# Altium PCB PCB2.PcbDoc
Units mm, origin at the board's own origin, x right, y up, seen from the top; angles counter-clockwise.
Board outline 91.06 x 48.64 mm, 2 copper layers (Top Layer, Bottom Layer); 45 components, 40 nets, 163 pads, 2 vias.
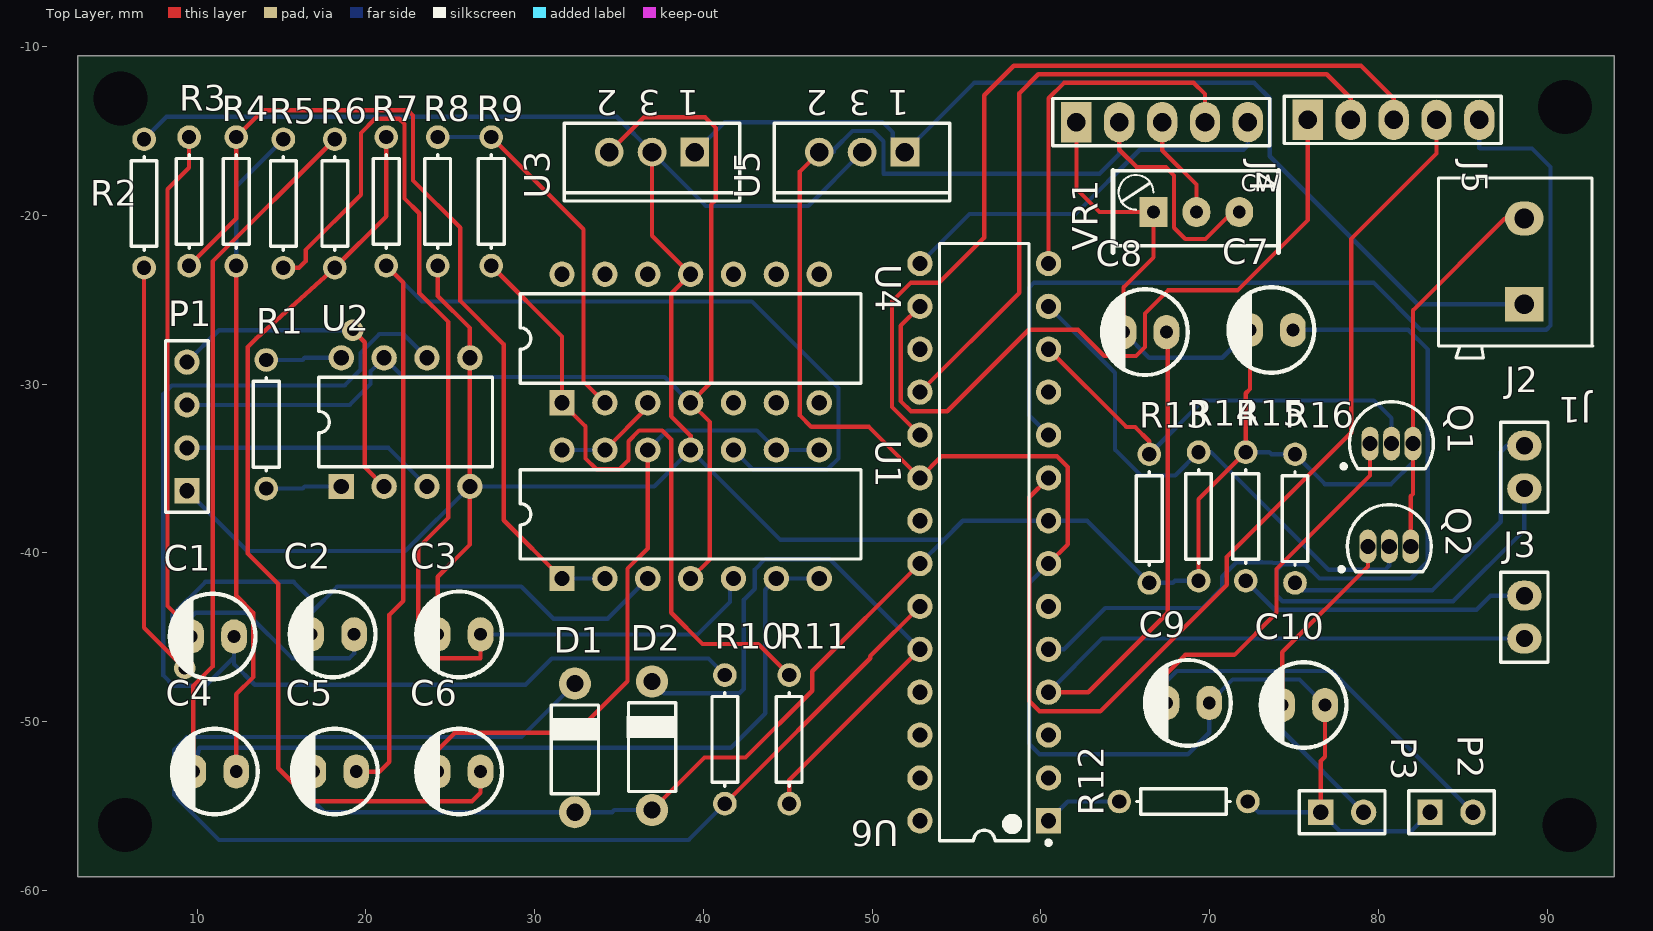
[diagram p0: Top Layer view]
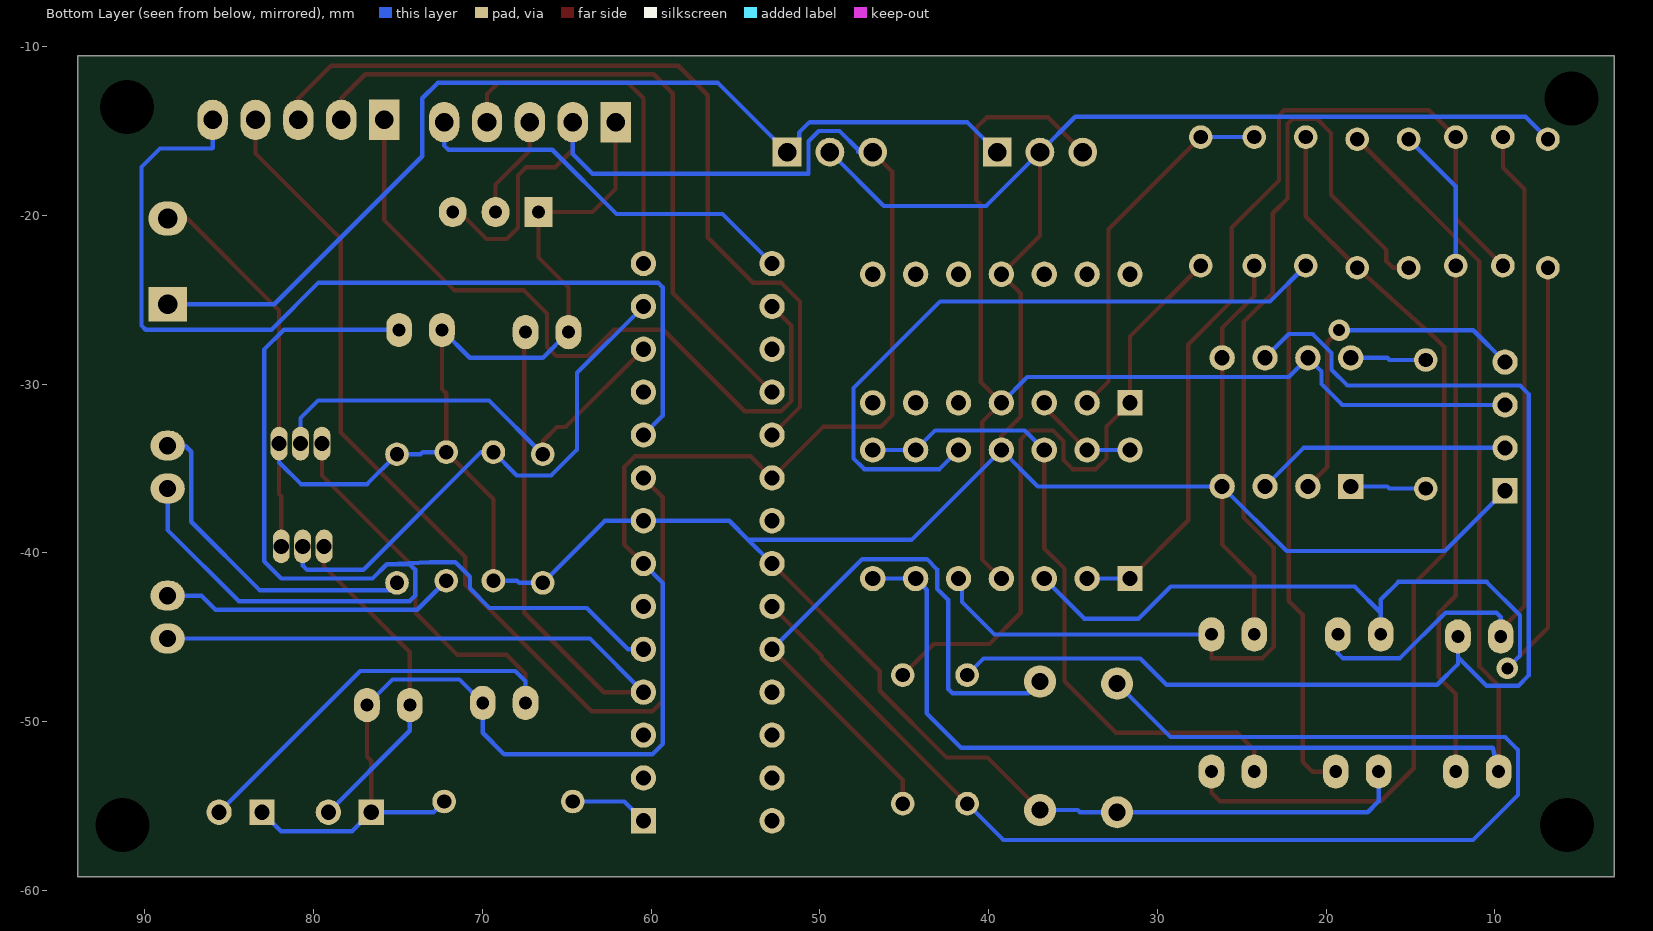
[diagram p1: Bottom Layer view, seen from below]

## Layer stack, top to bottom
Top Solder: solder mask 0.0102, Solder Resist, Dk 3.5
Top Layer: signal copper 0.0356
Dielectric 1: dielectric 0.32, FR-4, Dk 4.8
Bottom Layer: signal copper 0.0356
Bottom Solder: solder mask 0.0102, Solder Resist, Dk 3.5

## Board outline
2.921,-59.182 93.98,-59.182 93.98,-10.541 2.921,-10.541

## Design rules (kind name [scope] priority, off if disabled: settings)
Clearance [All] p1: gap=0.254
PolygonConnect [All] p1: connectstyle=Relief reliefconductorwidth=0.254 reliefentries=4 polygonreliefangle="90 Angle" airgapwidth=0.254
RoutingVias [All] p1: holewidth=0.711 width=1.27 viastyle="Through Hole" minholewidth=0.711 minwidth=1.27 maxholewidth=0.711 maxwidth=1.27
SolderMaskExpansion [All] p1: expansion=0.102
Width [All] p1: maxlimit=0.254 minlimit=0.254 preferedwidth=0.254
30 further rules are at their usual default settings.

## Components (designator, comment, footprint, x,y, rotation, side; value= is the part's Value field where it differs from the comment)
C1 "2.2u" ELEC-CAP-RAD10-20 10.922,-44.958 r0 top
C2 "2.2u" ELEC-CAP-RAD10-20 18.034,-44.831 r0 top
C3 "100n" ELEC-CAP-RAD10-20 25.527,-44.831 r0 top
C4 "100n" ELEC-CAP-RAD10-20 11.049,-52.959 r0 top
C5 "100n" ELEC-CAP-RAD10-20 18.161,-52.959 r0 top
C6 "100n" ELEC-CAP-RAD10-20 25.527,-52.959 r0 top
C7 "100n" ELEC-CAP-RAD10-20 73.66,-26.797 r0 top
C8 "100n" ELEC-CAP-RAD10-20 66.167,-26.924 r0 top
C9 "100n" ELEC-CAP-RAD10-20 68.707,-48.895 r0 top
C10 "100n" ELEC-CAP-RAD10-20 75.565,-49.022 r0 top
D1 "MODEL" DO-41 32.385,-55.372 r90 top
D2 "MODEL" DO-41 36.957,-55.245 r90 top
J1 "TBlock-2" "KF300-2 PIN" 88.646,-25.273 r180 top
J2 "Header2X1" "Header 2X1" 88.646,-34.925 r90 top
J3 "Header2X1" "Header 2X1" 88.646,-43.815 r90 top
J4 "Header5X1" "HEADER 5X1" 62.103,-14.478 r0 top
J5 "Header5X1" "HEADER 5X1" 75.819,-14.351 r0 top
P1 "Header 4" HDR1X4 9.398,-36.322 r90 top
P2 "Header 2" HDR1X2 83.058,-55.372 r0 top
P3 "Header 2" HDR1X2 76.581,-55.372 r0 top
Q1 "2N3904" TO-92A 80.772,-33.528 r270 top
Q2 "2N3904" TO-92A 80.645,-39.624 r270 top
R1 "Res1" AXIAL-0.3 14.097,-32.385 r90 top
R2 "Res1" AXIAL-0.3 6.858,-19.304 r90 top
R3 "Res1" AXIAL-0.3 9.525,-19.177 r90 top
R4 "Res1" AXIAL-0.3 12.319,-19.177 r90 top
R5 "Res1" AXIAL-0.3 15.113,-19.304 r90 top
R6 "Res1" AXIAL-0.3 18.161,-19.304 r90 top
R7 "Res1" AXIAL-0.3 21.209,-19.177 r90 top
R8 "Res1" AXIAL-0.3 24.257,-19.177 r90 top
R9 "Res1" AXIAL-0.3 27.432,-19.177 r90 top
R10 "Res1" AXIAL-0.3 41.275,-51.054 r90 top
R11 "Res1" AXIAL-0.3 45.085,-51.054 r90 top
R12 "Res1" AXIAL-0.3 68.453,-54.737 r180 top
R13 "Res1" AXIAL-0.3 66.421,-37.973 r90 top
R14 "Res1" AXIAL-0.3 69.342,-37.846 r90 top
R15 "Res1" AXIAL-0.3 72.136,-37.846 r90 top
R16 "Res1" AXIAL-0.3 75.057,-37.973 r90 top
U1 "LM324N" DIP14 39.243,-37.719 r0 top
U2 "AD620AN" N-8 22.352,-32.258 r0 top
U3 "L7809CV" TO220ABN 36.957,-16.256 r180 top
U4 "LM324N" DIP14 39.243,-27.305 r0 top
U5 "L7805CV" TO220ABN 49.403,-16.256 r180 top
U6 "ATmega8A-PU" 28P3 56.642,-39.37 r180 top
VR1 "10K" "Multi Turn" 69.215,-19.812 r90 top

## Footprints (in the part's own frame and the unit in brackets; to place one, negate y for a bottom-side part, rotate by r counter-clockwise, add the part's x,y. Pads: shape width x height; smd on the part's side, far side on the other; paste and mask are expansions set on the pad)
28P3 [mm] "DIP, 28-Leads, Row Spacing 7.62mm, Pitch 2.54mm, Body 34.67x7.3mm"
  rect 1.5x1.5 hole 0.9: 1(-3.81,16.51)
  round 1.5 hole 0.9: 2(-3.81,13.97) 3(-3.81,11.43) 4(-3.81,8.89) 5(-3.81,6.35) 6(-3.81,3.81) 7(-3.81,1.27) 8(-3.81,-1.27) 9(-3.81,-3.81) 10(-3.81,-6.35) 11(-3.81,-8.89) 12(-3.81,-11.43) 13(-3.81,-13.97) 14(-3.81,-16.51) 15(3.81,-16.51) 16(3.81,-13.97) 17(3.81,-11.43) 18(3.81,-8.89) 19(3.81,-6.35) 20(3.81,-3.81) 21(3.81,-1.27) 22(3.81,1.27) 23(3.81,3.81) 24(3.81,6.35) 25(3.81,8.89) 26(3.81,11.43) 27(3.81,13.97) 28(3.81,16.51)
  silkscreen extent -3.94,-17.7 2.65,17.93, body extent -3.6,-17.65 3.6,17.65, height 4.58
AXIAL-0.3 [mm] "Axial Device, Thru-Hole; 2 Leads; 0.3 in Pin Spacing"
  round 1.4 hole 0.85: 1(-3.81,0) 2(3.81,0)
  silkscreen extent -2.77,-0.76 2.77,0.76
DIP14 [mm] "DIP; 14 Leads; Row Spacing 7.62 mm; Pitch 2.54 mm"
  rect 1.5x1.5 hole 0.9: 1(-7.62,-3.81)
  round 1.5 hole 0.9: 2(-5.08,-3.81) 3(-2.54,-3.81) 4(0,-3.81) 5(2.54,-3.81) 6(5.08,-3.81) 7(7.62,-3.81) 8(7.62,3.81) 9(5.08,3.81) 10(2.54,3.81) 11(0,3.81) 12(-2.54,3.81) 13(-5.08,3.81) 14(-7.62,3.81)
  silkscreen extent -10.1,-2.65 10.1,2.65
DO-41 [mil]
  round 75 hole 40: 1(0,0) 2(300,0)
  silkscreen extent 43,-59 250,59, body extent -16,-52 315,53, height 131
ELEC-CAP-RAD10-20 [mil]
  oval 60x80 hole 30: 1(-50,0) 2(50,0)
  silkscreen extent -100,-100 100,100, body extent -124,-124 124,124, height 404
HDR1X2 [mm] "Connector; Header; 2 Position"
  rect 1.5x1.5 hole 0.9: 1(0,0)
  round 1.5 hole 0.9: 2(2.54,0)
  silkscreen extent -1.27,-1.27 3.81,1.27
HDR1X4 [mm] "Connector; Header; 4 Position"
  rect 1.5x1.5 hole 0.9: 1(0,0)
  round 1.5 hole 0.9: 2(2.54,0) 3(5.08,0) 4(7.62,0)
  silkscreen extent -1.27,-1.27 8.89,1.27
"Header 2X1" [mil]
  oval 70x80 hole 40: 1(-50,0) 2(50,0)
  silkscreen extent -105,-55 105,55, body extent -100,-50 100,50, height 374
"HEADER 5X1" [mm]
  rect 1.8x2.4 hole 1.1: 1(0,0)
  oval 1.8x2.4 hole 1.1: 2(2.54,0) 3(5.08,0) 4(7.62,0) 5(10.16,0)
  silkscreen extent -1.4,-1.4 11.46,1.4, body extent -1.22,-1.19 11.48,1.35, height 8.38
"KF300-2 PIN" [mil]
  rect 90x80 hole 46: 1(0,0)
  oval 90x80 hole 46: 2(0,-200)
  silkscreen extent -160,-295 200,125, body extent -157,-295 200,127, height 493
"Multi Turn" [mil]
  rect 70x65 hole 30: 1(0,100)
  oval 70x65 hole 30: 2(0,0) 3(0,-100)
  silkscreen extent -94,-191 96,194, body extent -73,-185 93,189, height 452
N-8 [mm] "DIP; 8 Leads; Row Spacing 7.62 mm; Pitch 2.54 mm"
  rect 1.5x1.5 hole 0.9: 1(-3.81,-3.81)
  round 1.5 hole 0.9: 2(-1.27,-3.81) 3(1.27,-3.81) 4(3.81,-3.81) 5(3.81,3.81) 6(1.27,3.81) 7(-1.27,3.81) 8(-3.81,3.81)
  silkscreen extent -5.15,-2.65 5.15,2.65
TO220ABN [mm] "TO, Thru-Hole, Vertical, Heatsink Mounted; 3 In-Line Leads; Pitch 2.54 mm; Pin sequence 1, 3, 2"
  rect 1.7x1.7 hole 1.1: 1(-2.54,0)
  round 1.7 hole 1.1: 2(2.54,0) 3(0,0)
  silkscreen extent -5.2,-1.7 5.2,2.9
TO-92A [mm] "TO, Flat Index; 3 In-Line, Axial Leads; Body Dia. 4.5mm; Leads 0.51 x 0.48 mm (max)"
  oval 2x1 hole 0.9: 1(0,-1.27) 2(0,0) 3(0,1.27)
  silkscreen extent -2.48,-2.95 1.5,2.48, body extent -2.48,-2.5 1.5,2.5, height 6.86

## Part data
C1 C2 C3 C4 C5 C6 C7 C8 C9 C10: library part "Capacitor Electrolytic", "Electrolytic Capacitor"
D1 D2: library part Diode, "Diode"
P1: "Header, 4-Pin"
P2 P3: "Header, 2-Pin"
Q1 Q2: "NPN General Purpose Amplifier"
R1 R2 R3 R4 R5 R6 R7 R8 R9 R10 R11 R12 R13 R14 R15 R16: "Resistor"
U1 U4: "Low-Power Quad Operational Amplifier"
U2: "Low-Cost, Low-Power Instrumentation Amplifier"
U3 U5: "Positive Voltage Regulator"
U6: "8-bit AVR Microcontroller, 8KB Flash, 512 Bytes EEPROM, 1KB SRAM, 28-pin PDIP, Industrial Grade (-40°C to 85°C)"
VR1: library part "Resistor Variable", "Variable Resistor"

## Free pads (board coordinates)
  round 1.6 hole 3.2: 0(91.059,-13.589) 1(91.313,-56.134) 2(5.715,-56.134) 3(5.461,-13.081)

## Via types
v1: diameter 1.27, hole 0.711, Top Layer to Bottom Layer, 2 vias

## Nets (pads, with @x,y where several pads share a name; then routed paths per layer and width w, separated by ;. In a path a pad name is that pad's centre, name@x,y a point inside that pad or via, vN(x,y) a via of type N, cw(c..) or ccw(c..) an arc to the next point about the centre after c; other vN are vias at no path point)
1INT: J3.2 R15.1 | length 17.6
  Bottom Layer w0.254: R15.1 73.852,-43.372 85.814,-43.372 86.641,-42.545 J3.2
2INT: C7.2 J2.1 U6.5 | length 69.2
  Bottom Layer w0.254: U6.5 61.364,-45.72 63.812,-43.272 69.568,-43.272 70.736,-42.103 70.736,-41.417 71.6,-40.554 73.099,-40.554 75.664,-40.681 ; C7.2 74.93,-26.787 81.76,-26.787 82.928,-27.955 82.928,-40.503 81.912,-41.519 76.502,-41.519 75.664,-40.681 ; J2.1 88.646,-38.646 84.428,-42.864 74.305,-42.864 73.976,-42.535 73.976,-41.011 74.306,-40.681 75.664,-40.681
3INT: J2.2 R16.1 | length 19.7
  Bottom Layer w0.254: R16.1 75.488,-42.214 83.196,-42.214 87.246,-38.164 87.246,-34.011 87.602,-33.655 J2.2
D4: J5.2 U6.18 | length 42.1
  Top Layer w0.254: U6.18 58.722,-24.59 58.722,-12.766 59.84,-11.649 76.937,-11.649 78.359,-13.071 J5.2
D5: J5.3 U6.19 | length 51.1
  Top Layer w0.254: U6.19 51.178,-31.366 51.178,-25.111 52.296,-23.993 53.972,-23.993 56.639,-21.326 56.639,-12.893 58.392,-11.141 78.969,-11.141 80.899,-13.071 J5.3
D6: J5.4 U6.9 | length 61.5
  Top Layer w0.254: U6.9 59.306,-36.706 59.306,-48.783 59.916,-49.393 63.523,-49.393 71.016,-41.9 71.016,-40.249 78.382,-32.883 78.382,-21.402 83.439,-16.345 J5.4
D7: J5.5 U6.10 | length 57.2
  Bottom Layer w0.254: U6.10 59.306,-31.874 59.306,-24.272 59.586,-23.993 79.703,-23.993 82.497,-26.787 89.939,-26.787 90.193,-26.533 90.193,-17.135 89.101,-16.043 86.002,-16.043 85.979,-16.02 J5.5
EN: J5.1 U6.16 | length 43.5
  Top Layer w0.254: U6.16 51.686,-26.546 51.686,-31.003 52.296,-31.613 54.455,-31.613 59.281,-26.787 62.202,-26.787 63.751,-28.336 65.631,-28.336 66.164,-27.803 66.164,-25.822 67.536,-24.45 71.651,-24.45 75.819,-20.282 J5.1
GND: C3.1 C5.1 C7.1 C8.1 D1.1 D2.1 J1.2 J4.1 P1.1 Q1.3 Q2.3 R2.2 R8.1 R13.1 R14.1 R15.2 R16.2 U1.11 U2.4 U2.5 U3.3 U4.11 U5.3 U6.8 U6.22 VR1.1 | length 281.6
  Top Layer w0.254: C3.1 24.257,-41.417 26.162,-39.512 U2.4 U2.5 26.162,-26.685 24.257,-24.78 R8.1 ; D2.1 40.066,-52.136 42.492,-52.136 46.454,-48.174 46.454,-47.018 U6.22 ; U3.3 36.957,-21.209 U4.11 38.097,-24.641 38.097,-31.918 39.243,-33.063 U1.11 ; J4.1 62.103,-18.443 63.472,-19.812 VR1.1 66.675,-22.494 64.897,-24.272 C8.1 ; R14.1 69.342,-36.83 R15.2 72.136,-30.546 72.39,-30.292 C7.1 ; Q2.3 81.915,-36.642 82.042,-36.515 Q1.3 82.042,-25.636 87.485,-20.193 J1.2
  Bottom Layer w0.254: R2.2 8.189,-14.163 34.864,-14.163 U3.3 40.147,-19.446 46.213,-19.446 U5.3 ; P1.1 12.969,-39.893 22.337,-39.893 U2.4 37.084,-36.068 U1.11 44.567,-39.233 54.239,-39.233 ; C5.1 16.891,-54.727 17.536,-55.372 D1.1 34.592,-55.372 34.719,-55.245 D2.1 ; U6.22 54.239,-39.233 ; C8.1 66.411,-28.438 70.749,-28.438 C7.1 ; R14.1 67.942,-41.656 67.815,-41.783 R13.1 62.738,-38.1 U6.8 55.372,-38.1 54.239,-39.233 ; R15.2 73.53,-34.036 73.657,-34.163 R16.2 76.825,-35.931 80.744,-35.931 82.042,-34.633 Q1.3
INT: C8.2 J3.1 U6.4 | length 55.2
  Top Layer w0.254: U6.4 62.802,-48.26 67.511,-43.551 67.511,-27.168 67.437,-27.168 C8.2
  Bottom Layer w0.254: U6.4 63.627,-45.085 J3.1
NetC1_1: C1.1 C2.2 R3.2 | length 44
  Top Layer w0.254: R3.2 9.525,-17.183 8.252,-18.456 8.252,-43.152 9.652,-44.552 C1.1
  Bottom Layer w0.254: C1.1 9.652,-43.805 9.906,-43.551 12.926,-43.551 15.618,-46.243 19.022,-46.243 19.304,-45.961 C2.2
NetC1_2: C1.2 R10.2 U2.6 | length 72.4
  Bottom Layer w0.254: C1.2 12.192,-46.187 ; U2.6 22.215,-27.041 20.8,-27.041 19.682,-28.159 19.682,-29.149 18.743,-30.089 8.506,-30.089 8.001,-30.594 8.001,-47.272 8.608,-47.879 10.5,-47.879 12.192,-46.187 ; R10.2 40.3,-46.269 31.011,-46.269 29.461,-47.818 13.411,-47.818 12.192,-46.599 12.192,-46.187
NetC2_1: C2.1 R2.1 U1.3 | length 62.1
  Top Layer w0.254: R2.1 6.858,-44.443 v1(9.268,-46.853)
  Bottom Layer w0.254: v1(9.268,-46.853) 8.509,-46.094 8.509,-43.703 10.49,-41.722 15.72,-41.722 16.764,-42.766 16.764,-43.551 ; C2.1 16.764,-43.551 ; U1.3 34.325,-43.907 31.112,-43.907 29.207,-42.002 18.313,-42.002 16.764,-43.551
NetC3_2: C3.2 R5.1 U1.5 | length 68.9
  Top Layer w0.254: R5.1 16.04,-23.114 16.431,-22.723 16.431,-22.063 19.708,-18.786 19.708,-15.128 20.55,-14.286 21.981,-14.286 22.29,-14.595 22.29,-19.006 23.162,-19.878 23.162,-24.603 24.889,-26.33 24.889,-37.912 23.111,-39.69 23.111,-45.583 23.772,-46.243 26.797,-46.243 C3.2
  Bottom Layer w0.254: C3.2 26.797,-44.846 39.647,-44.846 41.577,-42.916 41.577,-41.529 U1.5
NetC4_1: C4.1 R6.2 U1.6 U1.7 | length 87.6
  Top Layer w0.254: C4.1 9.779,-47.879 10.919,-46.739 10.919,-22.736 R6.2
  Bottom Layer w0.254: C4.1 10.132,-51.552 41.628,-51.552 43.664,-49.516 43.664,-42.188 U1.6 U1.7
NetC4_2: C4.2 R4.1 R5.2 | length 39.5
  Top Layer w0.254: C4.2 12.319,-48.376 13.335,-47.36 13.335,-43.561 12.319,-42.545 R4.1
  Bottom Layer w0.254: R4.1 12.319,-18.288 R5.2
NetC5_2: C5.2 R7.1 U1.10 | length 73.3
  Top Layer w0.254: C5.2 19.431,-52.974 20.8,-52.974 21.384,-52.39 21.384,-43.678 22.222,-42.84 22.222,-24 R7.1
  Bottom Layer w0.254: R7.1 23.333,-25.111 42.873,-25.111 48.003,-30.241 48.003,-34.407 47.368,-35.042 42.916,-35.042 U1.10
NetC6_1: C6.1 U1.8 U1.9 U1.12 | length 39.5
  Top Layer w0.254: C6.1 24.257,-51.679 25.273,-50.663 32.459,-50.663 35.507,-47.615 35.507,-40.937 36.703,-39.741 U1.12
  Bottom Layer w0.254: U1.12 37.856,-32.756 43.17,-32.756 U1.9 U1.8
NetC6_2: C6.2 R6.1 R7.2 | length 56
  Top Layer w0.254: R7.2 21.209,-20.066 R6.1 13.51,-27.295 13.002,-27.803 13.002,-40.046 14.806,-41.849 14.806,-52.771 16.761,-54.727 26.289,-54.727 26.797,-54.219 C6.2
NetJ4_3: J4.3 VR1.2 | length 6.2
  Top Layer w0.254: J4.3 67.183,-16.144 69.215,-18.176 VR1.2
NetP1_2: P1.2 U2.3 | length 15.2
  Bottom Layer w0.254: P1.2 21.336,-33.782 U2.3
NetP1_4: P1.4 U2.2 | length 20.6
  Top Layer w0.254: v1(19.225,-26.812) 19.936,-27.524 19.936,-34.922 U2.2
  Bottom Layer w0.254: P1.4 11.288,-26.812 v1(19.225,-26.812)
NetR1_1: R1.1 U2.1 | length 4.5
  Bottom Layer w0.254: R1.1 16.253,-36.195 16.38,-36.068 U2.1
NetR1_2: R1.2 U2.8 | length 4.5
  Bottom Layer w0.254: R1.2 16.253,-28.575 16.38,-28.448 U2.8
NetR3_1: R3.1 R4.2 U1.1 U1.2 | length 53.7
  Top Layer w0.254: R3.1 12.319,-20.193 R4.2 13.908,-13.778 22.489,-13.778 22.798,-14.087 22.798,-17.939 25.601,-20.742 25.601,-25.085 28.166,-27.651 28.166,-38.072 U1.1
  Bottom Layer w0.254: U1.1 U1.2
NetR8_2: R8.2 R9.2 U4.2 | length 21.7
  Top Layer w0.254: R9.2 32.89,-20.825 32.89,-29.842 U4.2
  Bottom Layer w0.254: R8.2 R9.2
NetR9_1: R9.1 R11.2 U4.1 | length 39.7
  Top Layer w0.254: R9.1 31.623,-27.178 U4.1 33.017,-32.509 33.017,-34.407 33.652,-35.042 35.024,-35.042 35.557,-34.509 35.557,-33.391 36.192,-32.756 37.564,-32.756 38.097,-33.289 38.097,-43.551 39.952,-45.405 43.246,-45.405 R11.2
NetR12_2: R12.2 U6.1 | length 4.7
  Bottom Layer w0.254: U6.1 61.595,-54.737 R12.2
NetU1_13: U1.13 U1.14 U4.3 | length 6.4
  Top Layer w0.254: U1.13 36.703,-31.369 U4.3
  Bottom Layer w0.254: U1.14 U1.13
P6D: Q1.2 R13.2 U6.12 | length 26.6
  Top Layer w0.254: U6.12 65.065,-32.553 65.583,-32.553 66.421,-33.391 R13.2
  Bottom Layer w0.254: R13.2 69.606,-30.978 79.728,-30.978 80.772,-32.022 Q1.2
P7D: Q2.2 R14.2 U6.13 | length 31.7
  Bottom Layer w0.254: U6.13 64.386,-29.334 64.386,-33.886 65.923,-35.423 67.955,-35.423 R14.2 70.076,-34.036 77.051,-41.011 80.391,-41.011 80.645,-40.757 Q2.2
PC0: D1.2 R10.1 U6.23 | length 79.2
  Top Layer w0.254: R10.1 49.889,-46.25 49.889,-46.123 U6.23
  Bottom Layer w0.254: D1.2 29.22,-50.917 9.395,-50.917 8.633,-51.679 8.633,-54.346 11.3,-57.013 39.126,-57.013 R10.1
PC1: D2.2 R11.1 U6.24 | length 37.8
  Top Layer w0.254: R11.1 45.085,-53.467 U6.24
  Bottom Layer w0.254: D2.2 37.658,-48.326 42.136,-48.326 42.39,-48.072 42.39,-42.789 43.05,-42.129 43.05,-40.986 43.66,-40.376 47.488,-40.376 U6.24
PUMP: C9.1 P2.2 Q1.1 | length 45.2
  Top Layer w0.254: C9.1 67.437,-47.165 68.552,-46.05 71.464,-46.05 73.962,-43.551 73.962,-40.963 79.502,-35.423 Q1.1
  Bottom Layer w0.254: C9.1 67.437,-47.612 68.044,-47.005 77.231,-47.005 P2.2
RS: J4.4 U6.14 | length 21.4
  Top Layer w0.254: U6.14 60.452,-13.071 61.366,-12.157 69.06,-12.157 69.723,-12.82 J4.4
RW: J4.5 U6.15 | length 23.7
  Bottom Layer w0.254: U6.15 55.763,-19.929 62.05,-19.929 65.86,-16.119 72.009,-16.119 72.263,-15.865 J4.5
V5V: C9.2 C10.2 J4.2 P2.1 P3.1 R12.1 U5.2 U6.7 U6.20 VR1.3 | length 127.7
  Top Layer w0.254: U5.2 45.717,-17.402 45.717,-31.867 46.39,-32.54 49.812,-32.54 U6.20 54.112,-34.28 60.957,-34.28 61.592,-34.915 61.592,-39.5 U6.7 ; J4.2 64.643,-16.119 65.684,-17.16 67.409,-17.16 67.892,-17.643 67.892,-20.742 68.552,-21.402 69.756,-21.402 71.346,-19.812 VR1.3 ; P3.1 76.581,-52.339 76.835,-52.085 C10.2
  Bottom Layer w0.254: U5.2 47.724,-16.256 47.724,-16.119 48.842,-15.001 50.061,-15.001 50.67,-15.611 50.67,-17.539 63.472,-17.539 64.643,-16.368 J4.2 ; U6.7 59.306,-41.786 59.306,-51.323 59.916,-51.933 68.707,-51.933 69.977,-50.663 C9.2 71.359,-47.513 75.326,-47.513 C10.2 ; R12.1 72.898,-55.372 P3.1 77.714,-56.505 81.925,-56.505 P2.1
VALVE: C10.1 P3.2 Q2.1 | length 19.9
  Top Layer w0.254: C10.1 74.295,-45.888 79.375,-40.808 Q2.1
  Bottom Layer w0.254: C10.1 74.295,-50.546 P3.2
VCC: P1.3 U1.4 U2.7 U3.2 U4.4 | length 68.3
  Top Layer w0.254: U3.2 36.484,-14.189 40.104,-14.189 40.739,-14.824 40.739,-19.091 40.46,-19.37 40.46,-29.898 U4.4 40.383,-32.255 40.383,-40.389 U1.4
  Bottom Layer w0.254: P1.3 19.04,-31.242 20.28,-30.002 20.28,-29.25 U2.7 22.215,-29.581 37.709,-29.581 U4.4
VIN: J1.1 U3.1 U5.1 | length 60
  Bottom Layer w0.254: U3.1 41.272,-14.481 50.606,-14.481 51.228,-15.103 51.228,-15.541 U5.1 56.042,-12.157 72.641,-12.157 73.556,-13.071 73.556,-16.5 82.329,-25.273 J1.1
pads on no net: U4.5 U4.6 U4.7 U4.8 U4.9 U4.10 U4.12 U4.13 U4.14 U6.2 U6.3 U6.6 U6.11 U6.17 U6.21 U6.25 U6.26 U6.27 U6.28

## Text inside footprints (layer, text, board x,y; h text height)
U3: Top Overlay "3" at 37.457,-12.581 h1.5 r180; Top Overlay "2" at 34.917,-12.581 h1.5 r180; Top Overlay "1" at 39.747,-12.581 h1.5 r180
U5: Top Overlay "3" at 49.903,-12.581 h1.5 r180; Top Overlay "2" at 47.363,-12.581 h1.5 r180; Top Overlay "1" at 52.193,-12.581 h1.5 r180
VR1: Top Overlay "CW" at 71.831,-18.593 h1